# Altium PCB EFR32MG24_Minimum_BOM_REF_DES_A00_PCB.PcbDoc
Units mm, origin at the board's own origin, x right, y up, seen from the top; angles counter-clockwise.
Board outline 19.7 x 27.79 mm, 4 copper layers (Top Layer, Inner 2 GND Plane, Inner 3 Signal Layer, Bottom Layer), stack 1.6 mm thick; 48 components, 47 nets, 142 pads, 167 vias.
Unrouted connection lines stored in the file: 3.
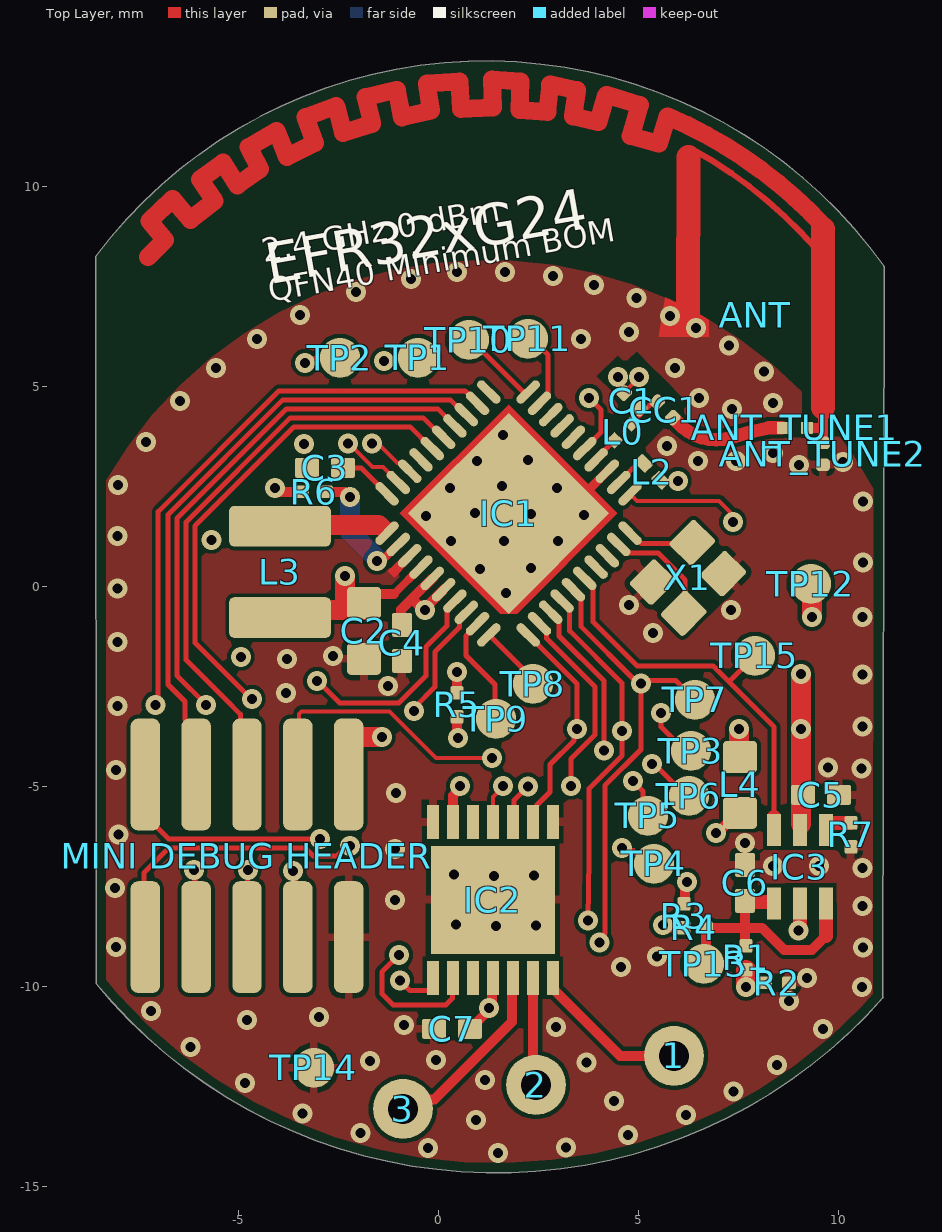
[diagram p0: Top Layer view]
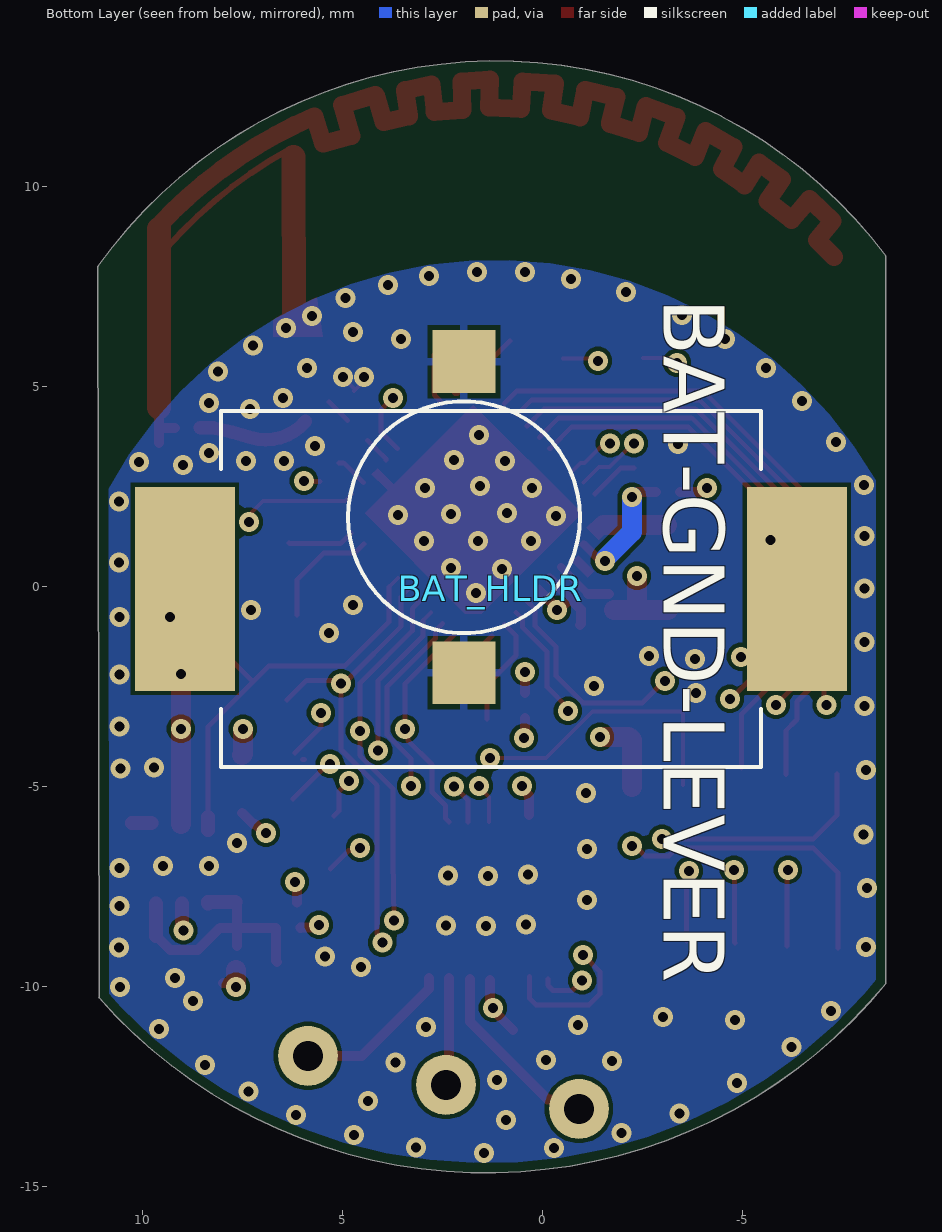
[diagram p1: Bottom Layer view, seen from below]
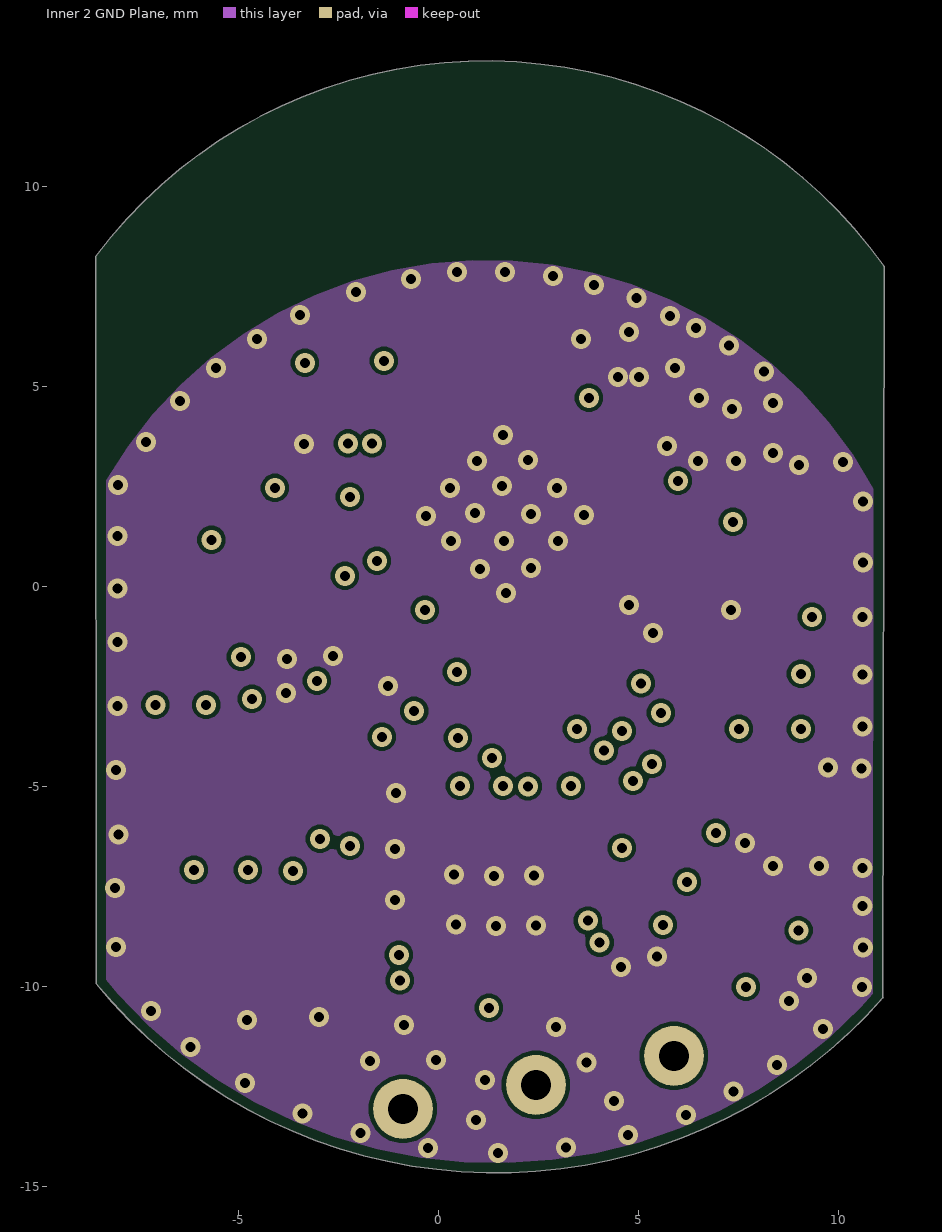
[diagram p2: Inner 2 GND Plane]
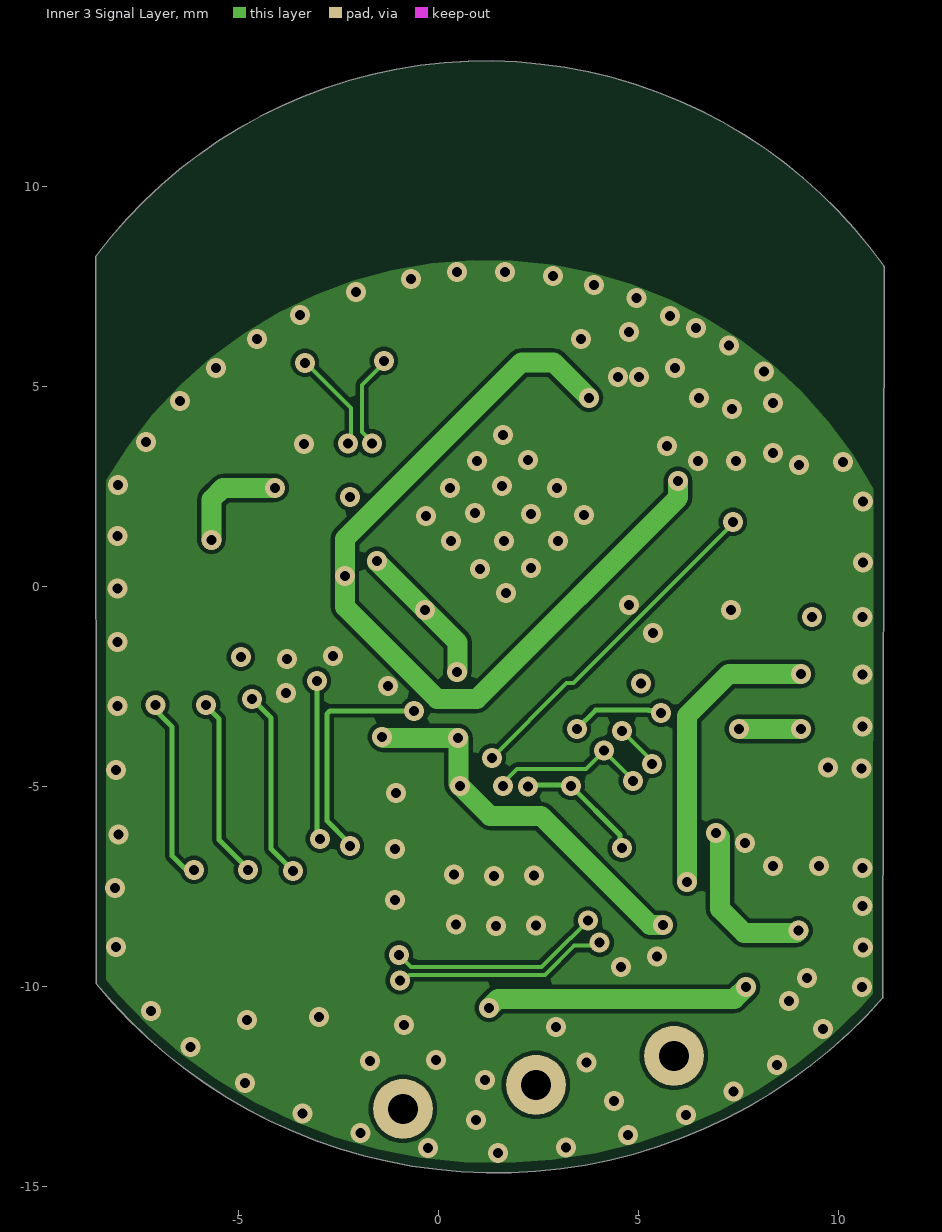
[diagram p3: Inner 3 Signal Layer]

## Layer stack, top to bottom
Top Solder: solder mask 0.0102, Solder Resist, Dk 3.5
Top Layer: signal copper 0.035
Dielectric 1: core 0.325, FR-4, Dk 4.2
Inner 2 GND Plane: signal copper 0.018
Dielectric 2: prepreg 0.844, FR-4, Dk 4.2
Inner 3 Signal Layer: signal copper 0.018
Dielectric 3: core 0.325, FR-4, Dk 4.2
Bottom Layer: signal copper 0.035
Bottom Solder: solder mask 0.0102, Solder Resist, Dk 3.5

## Board outline
-8.574,-9.914 ccw(c1.415,-1.751) 11.101,-10.271 11.1,-10.262 11.125,8.014 11.124,8.017 ccw(c1.181,0.947) -8.573,8.274 -8.575,8.261

## Design rules (kind name [scope] priority, off if disabled: settings)
AcuteAngle [All] p1: minimum=7.00000000000000E+0001 checktracksonly=FALSE
BoardOutlineClearance [All] p1: gap=0.25 ignorepadtopadclearanceinfootprint=FALSE
Clearance Clearance_50Ohm [InNetClass('50R_CC1')] p1: gap=0.27 ignorepadtopadclearanceinfootprint=FALSE
Clearance Clearance_to_Holes [InPadClass('NPTH')] p2: gap=0.254 ignorepadtopadclearanceinfootprint=FALSE except(0: Arc-Hole Track-Hole SMDPad-Hole THPad-Hole Via-Hole Fill-Hole Poly-Hole Region-Hole Text-Hole)
Clearance Clerance_Polygon [InPolygon] p3: gap=0.1 ignorepadtopadclearanceinfootprint=FALSE except(0: Arc-Hole Track-Hole SMDPad-Hole THPad-Hole Via-Hole Fill-Hole Poly-Hole Region-Hole Text-Hole)
Clearance Clearance_General [All] p4: gap=0.1 ignorepadtopadclearanceinfootprint=FALSE except(0: Arc-Hole Track-Hole SMDPad-Hole THPad-Hole Via-Hole Fill-Hole Poly-Hole Region-Hole Text-Hole)
HoleToHoleClearance HoleToHoleClearance_ANT1toPAD [Incomponent ('ANT1') vs ISpad] p1: gap=0 allowstackedmicrovias=TRUE
HoleToHoleClearance HoleToHoleClearance_R1toR2_1 [Incomponent ('R1') vs Incomponent ('R2')] p2: gap=0 allowstackedmicrovias=TRUE
HoleToHoleClearance HoleToHoleClearance_U1toVIA_1 [InComponent ('U1') vs IsVia] p3: gap=0 allowstackedmicrovias=TRUE
HoleToHoleClearance [All] p4: gap=0.254 allowstackedmicrovias=TRUE
MinimumSolderMaskSliver [All] p1: minsoldermaskwidth=0.075
PolygonConnect Polygon_VIA_Connect [IsVia] p1: connectstyle=Direct reliefconductorwidth=0.254 reliefentries=4 polygonreliefangle="90 Angle" airgapwidth=0.254
PolygonConnect PolygonConnect_SH100 [InComponent('ANT')] p2: connectstyle=Direct reliefconductorwidth=0.254 reliefentries=4 polygonreliefangle="90 Angle" airgapwidth=0.127
PolygonConnect PolygonConnect_P1 [InComponent('P1') or Incomponent('ANT')] p3: connectstyle=Relief reliefconductorwidth=0.3 reliefentries=4 polygonreliefangle="90 Angle" airgapwidth=0.127
PolygonConnect [All] p4: connectstyle=Relief reliefconductorwidth=0.2 reliefentries=4 polygonreliefangle="90 Angle" airgapwidth=0.125
RoutingVias [All] p1: holewidth=0.3 width=0.65 viastyle="Through Hole" minholewidth=0.25 minwidth=0.5 maxholewidth=1 maxwidth=1.5
ShortCircuit ShortCircuit_ANTtoPAD [InNet('NetAT1_1') vs InNet('GND')] p1: allowed=TRUE
ShortCircuit ShortCircuit_R1toR2_1 [Incomponent ('R1') vs Incomponent ('R2')] p2: allowed=TRUE
ShortCircuit [All] p3: allowed=FALSE
SilkToSilkClearance [All] p1: silktosilkclearance=0.102
SilkToSolderMaskClearance [IsPad] p1: minsilkscreentomaskgap=0.102 clearancetoexposedcopper=TRUE
SolderMaskExpansion [All] p1: expansion=0.051 istentingtop=FALSE
Width Supply [InNetClass('Supply')] p1: maxlimit=0.254 minlimit=0.2 preferedwidth=0.254 toplayer_maxwidth=0.2 toplayer_prefwidth=0.2 midlayer1_minwidth=0.254 midlayer2_minwidth=0.254 bottomlayer_maxwidth=0.2 bottomlayer_prefwidth=0.2 minimp=50.000000 maximp=50.000000 favimp=50.000000
Width 50ohm [InNet('50R*')] p2: maxlimit=0.6 minlimit=0.124 preferedwidth=0.457 midlayer1_maxwidth=0.457 midlayer2_maxwidth=0.457 minimp=50.000000 maximp=50.000000 favimp=50.000000
Width [All] p3: maxlimit=5.08 minlimit=0.1 preferedwidth=0.125
25 further rules are at their usual default settings.

## Components (designator, comment, footprint, x,y, rotation, side; value= is the part's Value field where it differs from the comment)
1 "Sensor Electrode" "Sensor Electrode" 5.875,-11.725 r90 top
2 "Sensor Electrode" "Sensor Electrode" 2.425,-12.45 r90 top
3 "Sensor Electrode" "Sensor Electrode" -0.9,-13.05 r90 top
ANT "INVERTED_F" "ANT_MEANDERED_2445 - FABRICATION - cut" 7.12,7.781 r90 top locked
ANT_TUNE1 "0R" COIL_0201_L 8.9,3.975 r0 top
ANT_TUNE2 "NM" C0201_L 9.6,3.325 r270 top
BAT-GND-LEVER "2991" 2991 1.975,1.74 r180 bottom locked
BAT_HLDR "BAT-HLD-012-SMT" BATHLD012SMT 1.3,-0.05 r180 bottom locked
C1 "1P4" C0201_L 4.825,4.65 r135 top
C2 "4U7" C0603_L -1.875,-1.1 r270 top
C3 "1U" C0402_L -2.85,2.975 r180 top
C4 "1U" C0402_L -0.925,-1.4 r270 top
C5 "10U" C0402_L 9.55,-5.2 r180 top
C6 "10U" C0402_L 7.65,-7.4 r270 top
C7 "NM" C0402_L 0.325,-11.05 r0 top
CC1 "18P" C0201_L 5.65,4.425 r315 top
Designator39 "Comment" PCB_SPEC_4_LAYER -128.425,108.325 r0 top
IC1 "EFR32MG24A010F1536IM40-B" QFN40_M040_5.0X5.0_EP_RP_SL 1.738,1.834 r135 top
IC2 "LMP91000SDE" SON50P400X400X80-15N 1.35,-7.825 r270 top
IC3 "MAX17223ELT+" MAX17223ELT 9.025,-7 r90 top
L0 "1N8" COIL_0201_L 4.6,3.875 r45 top
L2 "BLM03AG700SN1D" COIL_MUR_BLM03_0201 5.325,2.875 r135 top
L3 "2U2" COIL_1008_L -3.975,0.375 r270 top
L4 "1U" C0603_L 7.525,-4.95 r270 top
"MINI DEBUG HEADER" "FTSH-105-01-F-DV-K" FTSH_105_01_L_DV_K -4.8,-6.725 r180 top
R1 "NM" R0201_L 7.675,-9.275 r90 top
R2 "NM" R0201_L 8.45,-9.9 r180 top
R3 "0R" R0201_L 6.125,-8.225 r270 top
R4 "NM" R0201_L 6.375,-8.525 r180 top
R5 "0R" R0201_L 0.45,-2.95 r90 top
R6 "NM" R0201_L -3.125,2.375 r0 top
R7 "RSEL" R0201_L 10.3,-6.2 r270 top
TP1 "TP" TP_1.0_SMD -0.525,5.725 r0 top
TP2 "TP" TP_1.0_SMD -2.475,5.725 r90 top
TP3 "TP" TP_1.0_SMD 6.3,-4.1 r90 top
TP4 "TP" TP_1.0_SMD 5.375,-6.925 r90 top
TP5 "TP" TP_1.0_SMD 5.225,-5.725 r90 top
TP6 "TP" TP_1.0_SMD 6.25,-5.225 r90 top
TP7 "TP" TP_1.0_SMD 6.4,-2.825 r90 top
TP8 "TP" TP_1.0_SMD 2.35,-2.425 r90 top
TP9 "TP" TP_1.0_SMD 1.425,-3.3 r90 top
TP10 "TP" TP_1.0_SMD 0.75,6.175 r90 top
TP11 "TP" TP_1.0_SMD 2.225,6.2 r90 top
TP12 "TP" TP_1.0_SMD 9.3,0.075 r270 top
TP13 "TP" TP_1.0_SMD 6.625,-9.425 r90 top
TP14 "TP" TP_1.0_SMD -3.125,-12.025 r90 top
TP15 "TP" TP_1.0_SMD 7.9,-1.725 r90 top
X1 "39.000 MHz" X_SSS_DSX211SH_2.05X1.65-4 6.225,0.225 r225 top

## Footprints (in the part's own frame and the unit in brackets; to place one, negate y for a bottom-side part, rotate by r counter-clockwise, add the part's x,y. Pads: shape width x height; smd on the part's side, far side on the other; paste and mask are expansions set on the pad)
2991 [mm]
  rect 1.57x1.57 smd: 1(0,3.89) 2(0,-3.89)
  silkscreen extent -2.9,-2.9 2.9,2.9
"ANT_MEANDERED_2445 - FABRICATION - cut" [mm]
  round 0.2 on Mech16 paste-0.254 mask-0.254: 1(-1.715,-2.474) 2(-0.273,0.913)
  Top Layer lines w0.15: 3.16,0.782 cw(c-6.901,6.352) 0.664,-2.31
  Top Layer lines w0.45: 0.466,14.394 0.889,13.97 ; 0.908,13.983 1.362,14.362 1.917,13.782 1.395,13.337 1.87,12.728 2.402,13.095 2.824,12.52 2.258,12.16 2.665,11.592 3.21,11.877 3.615,11.177 2.97,10.92 3.314,10.223 3.96,10.459 4.246,9.693 3.565,9.515 3.796,8.793 4.459,8.957 4.642,8.174 3.956,8.046 4.123,7.321 4.806,7.424 4.847,6.603 4.168,6.571 4.196,5.775 4.899,5.798 4.854,5.083 4.145,5.111 4.094,4.412 4.777,4.339 4.635,3.668 3.982,3.773 3.836,3.136 4.519,2.935 4.264,2.1 3.489,2.328 3.298,1.62 3.983,1.404 cw(c-6.589,5.929) 1.2,-2.531
  Top Layer lines w0.6: -1.016,0.889 2.961,0.886 ; -2.366,-2.483 1.164,-2.483
BATHLD012SMT [mm]
  rect 2.5x5.1 smd: 1(-7.65,0) 2(7.65,0)
  silkscreen extent -6.75,-4.45 6.75,4.45, body extent -7.78,-4.83 7.52,4.67, height 3.61
C0201_L [mm] "Capacitor, Chip; 0.60 mm L X 0.30 mm W X 0.33 mm H body"
  rrect52% 0.31x0.34 smd: 1(-0.275,0) 2(0.275,0)
  body extent -0.3,-0.15 0.3,0.15, height 0.3
C0402_L [mm] "Chip Capacitor, 2-Leads, Body 1.0x0.5mm, IPC High Density"
  rrect20% 0.6x0.5 smd mask+0.051: 1(-0.45,0) 2(0.45,0)
  body extent -0.5,-0.25 0.5,0.25, height 0.6
C0603_L [mm] "Capacitor, 0603, HiDens (190130)"
  rrect25% 0.8x0.85 smd: 1(-0.7,0) 2(0.7,0)
  body extent -0.88,-0.48 0.87,0.48, height 0.95
COIL_0201_L [mm] "JELF243C-0021"
  rrect10% 0.3x0.3 smd: 1(-0.3,0) 2(0.3,0)
  body extent -0.32,-0.17 0.32,0.17, height 0.33
COIL_1008_L [mil] "Chip Inductors, 1008 (2520), Coilcraft (190207)"
  rrect25% 40x100 smd: 1(-45,0) 2(45,0)
  body extent -58,-55 57,55, height 80
COIL_MUR_BLM03_0201 [mm] "COIL_MUR_BLM03_0201"
  rrect25% 0.4x0.3 smd mask+0.051: 1(-0.3,0) 2(0.3,0)
  body extent -0.3,-0.15 0.3,0.15, height 0.95
FTSH_105_01_L_DV_K [mil] "FTSH-105-01-L-DV-K-P-TR"
  rrect50% 29x110 smd: 1(-100,-80) 2(-100,80) 3(-50,-80) 4(-50,80) 5(0,-80) 6(0,80) 7(50,-80) 8(50,80) 9(100,-80) 10(100,80)
  body extent -125,-115 125,115, height 231
MAX17223ELT [mm]
  rect 0.8x0.35 smd: 1(-0.915,0.65) 2(-0.915,0) 3(-0.915,-0.65) 4(0.915,-0.65) 5(0.915,0) 6(0.915,0.65)
  body extent -1,-1 1,1, height 0.9
PCB_SPEC_4_LAYER [mm]
QFN40_M040_5.0X5.0_EP_RP_SL [mm]
  rect 3.55x3.55 smd paste-1.95 mask+0.05: 0(0,0)
  oval 0.74x0.22 smd mask+0.05: 1(-2.495,1.8) 2(-2.495,1.4) 3(-2.495,1) 4(-2.495,0.6) 5(-2.495,0.2) 6(-2.495,-0.2) 7(-2.495,-0.6) 8(-2.495,-1) 9(-2.495,-1.4) 10(-2.495,-1.8) 21(2.495,-1.8) 22(2.495,-1.4) 23(2.495,-1) 24(2.495,-0.6) 25(2.495,-0.2) 26(2.495,0.2) 27(2.495,0.6) 28(2.495,1) 29(2.495,1.4) 30(2.495,1.8)
  oval 0.22x0.74 smd mask+0.05: 11(-1.8,-2.495) 12(-1.4,-2.495) 13(-1,-2.495) 14(-0.6,-2.495) 15(-0.2,-2.495) 16(0.2,-2.495) 17(0.6,-2.495) 18(1,-2.495) 19(1.4,-2.495) 20(1.8,-2.495) 31(1.8,2.495) 32(1.4,2.495) 33(1,2.495) 34(0.6,2.495) 35(0.2,2.495) 36(-0.2,2.495) 37(-0.6,2.495) 38(-1,2.495) 39(-1.4,2.495) 40(-1.8,2.495)
  Top Layer region: 1.925,-1.925 -1.925,-1.925 -1.925,1.625 -1.625,1.925 1.925,1.925
  Top Layer pour cut-out: -2.125,1.925 -2.125,-1.925 -1.925,-2.125 1.925,-2.125 2.125,-1.925 2.125,1.925 1.925,2.125 -1.925,2.125
  body extent -2.5,-2.5 2.5,2.5, height 1.01
R0201_L [mm] "Resistor (Chip2PinSM127P600-8N) (170921)"
  rrect25% 0.34x0.32 smd: 1(-0.3,0) 2(0.3,0)
  body extent -0.32,-0.13 0.32,0.13, height 0.3
"Sensor Electrode" [mm]
  round 1.5 hole 0.75: 1(0,0)
SON50P400X400X80-15N [mm]
  rect 0.85x0.3 smd: 1(-1.95,1.5) 2(-1.95,1) 3(-1.95,0.5) 4(-1.95,0) 5(-1.95,-0.5) 6(-1.95,-1) 7(-1.95,-1.5) 8(1.95,-1.5) 9(1.95,-1) 10(1.95,-0.5) 11(1.95,0) 12(1.95,0.5) 13(1.95,1) 14(1.95,1.5)
  rect 2.7x3.1 smd: 15(0,0)
  body extent -2,-2 2,2, height 0.8
TP_1.0_SMD [mm] "Test Point, 1.0 mm, SMD"
  round 1 smd paste-0.501: 1(0,0)
  body extent -0.2,-0.2 0.2,0.2, height 0.01
X_SSS_DSX211SH_2.05X1.65-4 [mm] "X_SSS_DSX211SH_2.05X1.65-4"
  rrect20% 0.9x0.8 smd mask+0.051: 1(-0.7,-0.55) 2(0.7,-0.55) 3(0.7,0.55) 4(-0.7,0.55)
  body extent -1.07,-0.87 1.07,0.87, height 0.5

## Part data
ANT_TUNE1 L0: library part L0201, Tolerance=±0.1N, Mfg=Murata, Mfg #=LQP03HQ2N5B02D, PCB Footprint=COIL_0201_L
ANT_TUNE2 C1 C5 C6: library part C0201, Tolerance=±0.05P, Mfg=Murata, Mfg #=GRM0335C1H1R6WA01D, PCB Footprint=C0201_L, Technology=C0G
BAT-GND-LEVER: "Undefined or Miscellaneous", Manufacturer_Name="Keystone Electronics", Mouser Part Number=534-2991, Arrow Part Number=2991, Arrow Price/Stock=https://www.arrow.com/en/products/2991/keystone-electronics, Datasheet Link=https://www.keyelco.com/product-pdf.cfm?p=3976, Height=0.41mm, Manufacturer_Part_Number=2991, Mouser Price/Stock=https://www.mouser.co.uk/ProductDetail/Keystone-Electronics/2991?qs=BmwE3IFx0MdjpbU%252BK1etPg%3D%3D
BAT_HLDR: "BATTERY RETAINER COIN 12MM SMD", Manufacturer=Linx, Category=Uncategorized, ComponentLink1Description=https://datasheet.ciiva.com/4/bat-hld-012-smt-4040.pdf?src-supplier=Digi-Key, ComponentLink1URL=https://datasheet.ciiva.com/4/bat-hld-012-smt-4040.pdf?src-supplier=Digi-Key, ComponentLink2Description=https://datasheet.ciiva.com/4642/bat-hld-012-smt20diagram-194862-4642562.pdf?src-supplier=Mouser, ComponentLink2URL=https://datasheet.ciiva.com/4642/bat-hld-012-smt20diagram-194862-4642562.pdf?src-supplier=Mouser, ComponentLink3Description=https://datasheet.ciiva.com/16418/bat-hld-012-smt-16418358.pdf?src-supplier=Future+Electronics, ComponentLink3URL=https://datasheet.ciiva.com/16418/bat-hld-012-smt-16418358.pdf?src-supplier=Future+Electronics, Manufacturer Part Number=BAT-HLD-012-SMT, Pricing 1="1=0,40000, 10=0,38300, 25=0,37520, 100=0,36800, 250=0,35000, 500=0,33500, 1000=0,30100, 5000=0,24960 (USD)", RoHS=Yes, Stock 1=35581, Supplier 1=Digi-Key
C2: library part C0603, Rating=6.3V, Tolerance=20%, PCB Footprint=C0603_L, Technology=X5R
C3 C4 C7: library part C0402, Rating=6.3V, Tolerance=10%, PCB Footprint=C0402_L, Technology=X7R
CC1: library part C0201, Tolerance=±2%, Mfg=Murata, Mfg #=GJM0335C1E180GB01D, PCB Footprint=C0201_L, Technology=C0G
IC1: library part EFR32xG24_QFN40, Mfg="Silicon Labs", Mfg #=EFR32MG24B210F1536IM48-BR, PCB Footprint=QFN48_M040_6.0X6.0_EP_SL
IC2: "Integrated Circuit", Manufacturer_Name="Texas Instruments", Datasheet Link=https://www.ti.com/lit/ds/symlink/lmp91000.pdf?ts=1600318850436&ref_url=https%253A%252F%252Fwww.ti.com%252Fstore%252Fti%252Fen%252Fp%252Fproduct%252F%253Fp%253DLMP91000SDE%252FNOPB, Height=0.8mm, Manufacturer_Part_Number=LMP91000SDE
IC3: "Integrated Circuit", Manufacturer_Name="Maxim Integrated", Mouser Part Number=700-MAX17223ELT+, Datasheet Link=https://componentsearchengine.com/Datasheets/1/MAX17223ELT+.pdf, Height=0.8mm, Manufacturer_Part_Number=MAX17223ELT+, Mouser Price/Stock=https://www.mouser.co.uk/ProductDetail/Maxim-Integrated/MAX17223ELT%2b?qs=xhbEVWpZdWfeoUoo5CwP2w%3D%3D
L2: library part BLM03AX, Mfg=Murata, Mfg #=BLM03AG700SN1D, PCB Footprint=COIL_MUR_BLM03_0201, Price_1K=0.05
L3 L4: library part L1008, Tolerance=+/-20%, Mfg=Murata, Mfg #=DFE2HCAH2R2MJ0L, PCB Footprint=COIL_1008_L
"MINI DEBUG HEADER": library part CN-2P-M-R10, "Male Header, Pitch 1.27 mm, 2 x 5 Position, Height 6.12 mm, RoHS, Tube", Color=Black, Manufacturer=Samtec, Package Description="Male Header, Pitch 1.27 mm, 2 x 5 Position, Height 5.97 mm, Tail Length 4.32 mm", Package Reference=FTSH-105-01-L-DV-K, Category=Connectors,Interconnects, Connector Type=Header,Shrouded, Contact Finish=Gold, Contact Finish Thickness=3µin(0.08µm), Contact Mating Length="0.120\"(3.05mm)", Contact Type=MalePin, Datasheet URL=http://suddendocs.samtec.com/prints/ftsh-1xx-xx-xxx-dv-xxx-mkt.pdf, Datasheet Version="Rev. ET, 10/1995", Family=RectangularConnectors-Headers,MalePins, Fastening Type=-, Features=-, Manufacturer URL=http://www.samtec.com/, Mounting Type=SurfaceMount, Number of Positions=10, Number of Positions Loaded=All, Number of Rows=2, Package URL=http://suddendocs.samtec.com/prints/ftsh-1xx-xx-xxx-dv-xxx-footprint.pdf, Packaging=Tube, Pitch="0.050\"(1.27mm)", Row Spacing="0.050\"(1.27mm)", Series=FTSH, Termination=Solder
R1 R2: library part Resistor, "100K,±0.1%,0402", 厂商=Yageo, 名称=电阻, 型号=100K,±0.1%, 封装=0402R, 物料代码=8.02.17.1406, 设备封装名称=R0402_100K, 贴片和直插=SMT
R3 R4 R5 R6 R7: library part R0201_0R
TP1 TP2 TP3 TP4 TP5 TP6 TP7 TP8 TP9 TP10 TP11 TP12 TP13 TP14 TP15: library part TPJ_SMD_Dup1, PCB Footprint=TP_1.0_SMD
X1: library part DSX211SH, Mfg=TXC, Mfg #=8Y39072002, PCB Footprint=KDS_DSX211SH_2016, Price_1K=0.512
1 2 3: 封装=1.2*1.2*0.6, 贴片和直插=孔洞
ANT: PCB Footprint=EM358x_INVERTED_F

## Via types
v1: diameter 0.5, hole 0.25, Top Layer to Bottom Layer, tented both sides, 167 vias

## Nets (pads, with @x,y where several pads share a name; then routed paths per layer and width w, separated by ;. In a path a pad name is that pad's centre, name@x,y a point inside that pad or via, vN(x,y) a via of type N, cw(c..) or ccw(c..) an arc to the next point about the centre after c; other vN are vias at no path point)
50R_ANT: ANT_TUNE1.2 ANT_TUNE2.1 | length 2.2
  Top Layer w0.25: ANT_TUNE1.2 9.575,3.975 ; ANT_TUNE2.1 9.6,4.482
  Top Layer w0.6: 9.601,4.482 9.601,5.434
50R_CC1: ANT_TUNE1.1 CC1.2 | length 2.8
  Top Layer w0.335: CC1.2@5.937,4.138 ccw(c6.928,4.969) 7.309,3.733 ; 7.312,3.734 cw(c9.8,-3.948) 8.243,3.975 ANT_TUNE1.1@8.575,3.975
ADC_in: IC1.4 TP6.1 | length 20.4
  Top Layer w0.125: v1(-1,-9.2) -1.425,-9.625 -1.425,-10.175 -1.15,-10.45 0.175,-10.45 0.337,-10.288 0.337,-9.737 ; IC1.4@3.075,-0.35 3.266,-0.541 3.266,-1.101 4.575,-2.41 v1(4.575,-3.6) 4.575,-4.222 3.75,-5.047 3.75,-6.813 3.728,-8.301 3.728,-8.339 v1(3.721,-8.346) ; v1(5.325,-4.425) 5.375,-4.425 TP6.1@6.25,-5.3
  Inner 3 Signal Layer w0.1: v1(-1,-9.2) -0.7,-9.5 2.567,-9.5 3.292,-8.775 3.3,-8.775 3.721,-8.354 v1(3.721,-8.346) ; v1(4.575,-3.6) 5.325,-4.35 v1(5.325,-4.425)
CE: 1.1 IC2.14 | length 4
  Top Layer w0.25: IC2.14 2.85,-10.05 2.875,-10.075 4.525,-11.725 1.1
EFR32_PA00: IC1.21
EFR32_PA01: "MINI DEBUG HEADER.8" IC1.22 | length 20.6
  Top Layer w0.125: v1(-7.091,-2.95) -7.019,-2.878 -7.019,1.879 -3.998,4.9 0.651,4.9 IC1.22 ; v1(-6.125,-7.075) -6.097,-7.102 -6.097,-8.972 -6.1,-8.975
  Inner 3 Signal Layer w0.125: v1(-7.091,-2.95) -7.091,-3.051 -6.973,-3.169 -6.973,-3.202 -6.675,-3.5 -6.675,-6.725 v1@-6.275,-7.125
EFR32_PA02: "MINI DEBUG HEADER.7" IC1.23 | length 15.6
  Top Layer w0.125: -6.07,-4.693 -6.07,-3.598 -6.35,-3.318 -6.35,-2.868 -6.775,-2.443 -6.775,1.805 -3.905,4.675 0.285,4.675 IC1.23@0.655,4.305
EFR32_PA03: "MINI DEBUG HEADER.6" IC1.24 | length 19.6
  Top Layer w0.125: v1(-5.821,-2.95) -6.55,-2.221 -6.55,1.711 -3.811,4.45 -0.03,4.45 IC1.24 ; -4.8,-8.9 -4.787,-8.887 -4.787,-7.087 v1(-4.775,-7.075)
  Inner 3 Signal Layer w0.125: v1(-5.821,-2.95) -5.821,-2.979 -5.5,-3.3 -5.5,-6.325 v1@-4.8,-7.025
EFR32_PA04: "MINI DEBUG HEADER.5" IC1.25 | length 14.4
  Top Layer w0.125: -4.965,-4.528 -4.965,-3.185 -5.35,-2.8 -6.325,-1.825 -6.325,1.618 -3.718,4.225 -0.396,4.225 IC1.25@0.089,3.739
EFR32_PA05: "MINI DEBUG HEADER.4" IC1.26 | length 18.6
  Top Layer w0.125: v1@-4.7,-2.8 -6.1,-1.4 -6.1,1.525 -3.625,4 -0.722,4 -0.179,3.456 IC1.26 ; v1(-3.65,-7.1) v1@-3.59,-7.16 ; v1@-3.625,-7.125 v1@-3.59,-7.16 ; -3.59,-8.86 v1@-3.59,-7.16
  Inner 3 Signal Layer w0.125: v1(-4.675,-2.8) -4.2,-3.275 -4.2,-6.55 v1@-3.675,-7.075
EFR32_PA06: IC1.27
EFR32_PA07: IC1.28 TP1.1 | length 4.5
  Top Layer w0.1: v1(-1.675,3.587) -1.598,3.511 -1.451,3.511 -1.038,3.097 -0.94,3.097 IC1.28 ; v1(-1.375,5.65) -1.321,5.704 TP1.1@-0.5,5.704
  Inner 3 Signal Layer w0.1: v1(-1.675,3.587) -1.675,3.625 -1.925,3.875 -1.925,5.051 v1@-1.35,5.626
EFR32_PA08: IC1.29 TP2.1 | length 5.1
  Top Layer w0.1: v1(-3.35,5.6) -3.291,5.6 -3.166,5.725 TP2.1@-2.5,5.725 ; v1(-2.275,3.584) -2.251,3.584 -1.658,2.991 -1.399,2.991 IC1.29
  Inner 3 Signal Layer w0.1: v1@-3.325,5.6 -2.2,4.475 -2.2,3.659 v1(-2.275,3.584)
EFR32_PB00: IC1.20 TP10.1 | length 2
  Top Layer w0.125: TP10.1@0.825,6.15 2.136,4.839 2.198,4.839 IC1.20
EFR32_PB01: IC1.19 TP11.1 | length 1.9
  Top Layer w0.125: TP11.1@2.3,6.225 2.725,5.8 2.725,4.868 2.714,4.857 2.714,4.79 IC1.19
EFR32_PB02: IC1.18
EFR32_PB03: IC1.17
EFR32_PB04: IC1.16
EFR32_PC00: IC1.1 IC2.2 TP3.1 | length 9.3
  Top Layer w0.125: IC1.1 3.45,-2.424 v1(3.45,-3.55) 3.378,-3.622 3.378,-3.84 2.775,-4.444 2.775,-5.129 2.437,-5.467 2.437,-5.788 IC2.2 ; v1(5.55,-3.15) 5.55,-3.5 TP3.1@6.2,-4.15 ; TP3.1@5.961,-4.311 TP3.1@6.011,-4.311
  Inner 3 Signal Layer w0.125: v1(3.45,-3.55) 3.917,-3.083 5.231,-3.083 5.24,-3.091 5.377,-3.091 5.475,-3.19 v1@5.475,-3.225
EFR32_PC01: IC1.2 IC2.3 TP4.1 | length 10
  Top Layer w0.125: IC2.3@1.875,-5.875 1.875,-5.333 v1(2.219,-4.989) ; IC1.2 2.686,-1.094 2.686,-1.287 3.9,-2.501 3.9,-3.7 3.297,-4.303 v1(3.297,-4.975) ; v1(4.571,-6.525) 4.643,-6.597 4.86,-6.597 TP4.1@5.314,-7.05
  Inner 3 Signal Layer w0.125: v1@2.225,-5 2.275,-4.95 3.272,-4.95 4.525,-6.203 4.525,-6.478 v1(4.571,-6.525)
EFR32_PC02: IC1.3 IC2.4 TP5.1 | length 9.9
  Top Layer w0.1: IC2.4 1.35,-5.258 v1@1.619,-4.989 ; IC1.3 IC1.3@3.002,-0.845
  Top Layer w0.125: IC1.3@3.002,-0.845 3.002,-1.228 4.125,-2.351 4.125,-4.089 v1(4.119,-4.094) ; v1(4.849,-4.849) 4.849,-4.858 5.101,-5.11 5.101,-5.601 TP5.1
  Inner 3 Signal Layer w0.1: v1@1.65,-4.85 1.95,-4.55 3.675,-4.55 4.119,-4.106 v1(4.119,-4.094) ; v1@4.125,-4.1 4.849,-4.824 v1(4.849,-4.849)
  other v1: 1.6,-4.975
EFR32_PC04: IC1.5 IC2.8 TP7.1 | length 18
  Top Layer w0.1: IC1.5 IC1.5@3.545,-0.256 ; 4.147,-5.37 4.147,-5.328
  Top Layer w0.125: v1(-0.981,-9.839) -0.729,-10.091 -0.25,-10.091 -0.125,-9.966 IC2.8@-0.125,-9.8 ; IC1.5@3.545,-0.256 3.545,-0.988 4.887,-2.331 v1@4.969,-2.331 ; v1(4.018,-8.896) 4.018,-8.795 4.147,-8.666 4.147,-5.37 ; 4.147,-5.328 4.147,-4.968 5.05,-4.065 v1(5.05,-2.413) 5.122,-2.341 5.916,-2.341 TP7.1
  Inner 3 Signal Layer w0.1: v1(-0.981,-9.839) -0.873,-9.839 -0.734,-9.7 2.65,-9.7 3.377,-8.973 3.942,-8.973 v1(4.018,-8.896)
EFR32_PC05: IC1.6 IC3.6 TP15.1 | length 10.3
  Top Layer w0.1: IC1.6@3.625,0.225 IC1.6@3.85,0
  Top Layer w0.125: IC1.6@3.85,0 3.85,-0.875 4.95,-1.975 6.85,-1.975 7.1,-2.225 7.25,-2.375 ; TP15.1 7.25,-2.375 ; IC3.6@8.375,-5.725 8.375,-3.5 7.375,-2.5 7.25,-2.375
  Top Layer w0.35: IC3.6 IC3.6@8.375,-5.75
EFR32_PC06: IC1.7
EFR32_PC07: IC1.8
EFR32_PD00: IC1.40 TP8.1 | length 1.6
  Top Layer w0.125: IC1.40@1.275,-1.225 TP8.1@2.378,-2.328
EFR32_PD01: IC1.39 TP9.1 | length 2.8
  Top Layer w0.125: IC1.39@0.964,-0.936 0.675,-1.225 0.675,-1.717 1.4,-2.442 TP9.1@1.4,-3.3
EFR32_PD02: "MINI DEBUG HEADER.10" IC1.38 | length 16.2
  Top Layer w0.125: -7.375,-9.025 -7.375,-7.15 -6.75,-6.525 -3.35,-6.525 -3.15,-6.725 -2.55,-6.725 v1@-2.29,-6.465 ; v1(-0.621,-3.104) -0.621,-3.021 -0.1,-2.5 -0.1,-1.625 0.507,-1.018 0.507,-0.811 IC1.38
  Inner 3 Signal Layer w0.125: v1@-2.246,-6.433 -2.235,-6.455 -2.235,-6.431 -2.243,-6.407 -2.28,-6.37 -2.8,-5.85 -2.8,-3.173 -2.727,-3.1 -0.625,-3.1 v1(-0.621,-3.104)
  other v1: -2.225,-6.475
EFR32_PD03: "MINI DEBUG HEADER.9" IC1.37 | length 15.1
  Top Layer w0.125: -7.35,-4.675 -7.35,-5.712 -6.762,-6.3 -2.954,-6.3 v1@-2.951,-6.304 ; v1(-3.05,-2.35) -3.039,-2.35 -2.489,-2.9 -1,-2.9 -0.325,-2.225 -0.325,-1.5 0.196,-0.979 0.196,-0.557 IC1.37
  Inner 3 Signal Layer w0.125: v1(-3.05,-2.35) -3.05,-6.099 -2.9,-6.249 v1@-2.9,-6.35
  other v1: -2.975,-6.3
GND: "MINI DEBUG HEADER.2" ANT_TUNE2.2 BAT-GND-LEVER.1 BAT-GND-LEVER.2 C1.2 C2.2 C3.2 C4.2 C5.1 C6.1 C7.1 IC1.13 IC1.33 IC2.1 IC2.7 IC2.15 R2.1 R7.2 TP14.1 X1.2 X1.4 | length 0.8
  Top Layer w0.1: v1@4.425,5.2 C1.2@4.706,4.919 ; C1.2@4.725,4.9 C1.2@4.706,4.919 ; v1@4.975,5.2 4.968,5.2 4.706,4.937 C1.2@4.706,4.919
  other v1: 1.475,-14.15 -0.275,-14.025 3.176,-14.017 4.725,-13.7 -1.961,-13.656 0.925,-13.325 6.175,-13.2 -3.412,-13.164 4.375,-12.85 7.359,-12.614 -4.855,-12.409 1.15,-12.325 8.45,-11.95 3.686,-11.893 -1.725,-11.85 -0.075,-11.825 -6.212,-11.507 9.6,-11.05 2.925,-11 -0.876,-10.955 -4.8,-10.825 -3,-10.75 -7.2,-10.6 8.75,-10.35 10.575,-10 9.2,-9.775 4.55,-9.5 5.453,-9.237 10.594,-9.02 -8.075,-9 1.425,-8.475 2.425,-8.466 0.425,-8.441 10.592,-7.974 -1.1,-7.825 -8.1,-7.525 1.375,-7.225 2.375,-7.216 0.375,-7.191 10.59,-7.029 8.35,-6.975 9.5,-6.975 -1.1,-6.55 7.65,-6.4 -8.018,-6.186 -1.075,-5.15 -8.075,-4.576 10.565,-4.539 9.723,-4.515 10.586,-3.488 -8.036,-2.978 -3.825,-2.65 -1.275,-2.475 10.591,-2.187 -3.8,-1.8 -2.65,-1.725 -8.043,-1.375 5.35,-1.15 10.59,-0.748 7.3,-0.575 4.75,-0.45 1.675,-0.15 -8.039,-0.045 1.025,0.45 2.3,0.475 10.604,0.606 0.3,1.15 1.625,1.15 2.975,1.15 -8.043,1.272 -0.325,1.775 3.625,1.8 2.3,1.825 0.9,1.85 10.598,2.133 0.275,2.475 2.95,2.475 1.575,2.525 -8.025,2.55 9,3.05 10.1,3.125 0.95,3.15 6.475,3.15 7.425,3.15 2.225,3.175 8.35,3.35 5.7,3.525 -3.375,3.575 -7.325,3.625 1.6,3.8 7.325,4.45 8.351,4.59 -6.475,4.65 6.5,4.725 4.475,5.25 5,5.25 8.121,5.382 -5.575,5.475 5.9,5.475 7.251,6.034 -4.55,6.2 3.55,6.2 4.75,6.375 6.425,6.475 5.775,6.775 -3.475,6.8 4.942,7.22 -2.075,7.375 3.875,7.55 -0.7,7.7 2.85,7.775 0.45,7.875 1.65,7.875
NetC1_1: C1.1 CC1.1 L0.2 | length 0.7
  Top Layer w0.125: L0.2@4.887,4.162 5.125,4.4 CC1.1@5.35,4.625
NetC3_1: C3.1 IC1.30 | length 1.2
  Top Layer w0.125: C3.1@-2.275,2.975 -1.95,2.975 IC1.30
NetIC1_9: IC1.9 X1.3 | length 2.9
  Top Layer w0.125: IC1.9@4.475,1.075 4.693,0.857 4.761,0.857 4.769,0.85 5.476,0.85 6.152,0.174 X1.3@6.152,-0.7
NetIC1_10: IC1.10 X1.1 | length 1.7
  Top Layer w0.125: IC1.10@4.801,1.342 5.063,1.08 6.33,1.08 X1.1@6.35,1.1
NetIC1_14: IC1.14 L0.1 | length 0.7
  Top Layer w0.125: IC1.14 3.926,3.199 4.158,3.431 4.158,3.433 L0.1
NetIC1_31: IC1.31 L3.1 | length 1.6
  Top Layer w0.5: L3.1@-3.1,1.55 -1.507,1.55
NetIC3_2: IC3.2 L4.2 | length 5.7
  Top Layer w0.25: v1(6.925,-6.15) 6.971,-6.15 7.196,-5.925 7.25,-5.925 L4.2
  Top Layer w0.35: v1(8.988,-8.59) 8.988,-8.549 9.025,-8.513 IC3.2
  Inner 3 Signal Layer w0.5: v1(6.925,-6.15) 7.025,-6.25 7.025,-8.05 7.625,-8.65 8.928,-8.65 v1(8.988,-8.59)
NetIC3_4: IC3.4 R7.1 | length 0.5
  Top Layer w0.35: IC3.4@9.788,-5.9 R7.1@10.275,-5.9
PAVDD: C2.1 IC1.15 IC1.34 L2.1 L3.2 | length 27.5
  Top Layer w0.125: IC1.15 4.05,3.863 4.05,4.425 v1(3.75,4.725) ; L2.1@5.572,2.628 5.953,2.628 v1(5.975,2.65)
  Top Layer w0.2: -1.119,-0.175 IC1.34
  Top Layer w0.25: C2.1@-1.65,-0.175 -1.119,-0.175
  Top Layer w0.5: L3.2@-3.125,-0.575 -2.408,-0.575 ; v1(-2.35,0.275) -2.35,-0.517 -2.408,-0.575 ; C2.1@-1.775,-0.575 -2.408,-0.575
  Inner 3 Signal Layer w0.5: v1(3.75,4.725) 2.868,5.607 2.057,5.607 -2.35,1.2 -2.35,-0.5 -0.05,-2.8 0.95,-2.8 5.98,2.23 5.98,2.645 v1(5.975,2.65)
RE: 2.1 IC2.13 | length 2.7
  Top Layer w0.25: IC2.13 2.35,-12.275 2.1@2.5,-12.425
RESET: "MINI DEBUG HEADER.3" IC1.11 | length 18.3
  Top Layer w0.1: -3.5,-4.95 -3.5,-3.175 -3.438,-3.113 -1.237,-3.113 -0.075,-4.275 v1@1.096,-4.275 ; IC1.11 4.95,2.15 7,2.15 7.273,1.877 7.273,1.702 v1(7.35,1.625)
  Inner 3 Signal Layer w0.1: v1(1.325,-4.275) 3.193,-2.407 3.359,-2.407 7.35,1.584 v1(7.35,1.625)
RFVDD: IC1.12 L2.2 | length 0.8
  Top Layer w0.125: IC1.12 4.984,3.1 L2.2@5.1,3.1
VBAT: BAT_HLDR.1 BAT_HLDR.2 C5.2 IC3.5 L4.1 R3.1 R6.1 TP12.1 | length 18.1
  Top Layer w0.25: v1(-4.102,2.472) -4.034,2.472 -3.937,2.375 R6.1 ; R3.1@6.144,-7.896 6.144,-7.498 6.2,-7.443 v1(6.2,-7.375)
  Top Layer w0.5: v1(7.5,-3.55) 7.5,-4.175 L4.1@7.525,-4.2 ; IC3.5@9.05,-5.935 9.05,-5.25 9.05,-5.2 9.05,-4.983 v1(9.05,-2.175) ; v1(9.325,-0.75) TP12.1@9.325,-0.05
  Inner 3 Signal Layer w0.5: v1(-5.687,1.175) -5.687,2.182 -5.395,2.475 v1@-4.125,2.475 ; v1(6.2,-7.375) 6.2,-3.225 7.25,-2.175 v1(9.05,-2.175) ; v1(7.5,-3.55) 7.507,-3.557 9.043,-3.557 v1(9.05,-3.55)
  other v1: -4.95,-1.75
VBAT_reg: C6.2 IC3.1 IC3.3 R1.2 R4.1 TP13.1 | length 6.9
  Top Layer w0.25: TP13.1@6.65,-9.375 6.675,-9.35 R4.1 7.65,-8.525 ; R1.2@7.65,-8.975 7.65,-8.525 ; C6.2 7.65,-8.525 ; 9.675,-8.725 9.325,-9.075 8.625,-9.075 8.075,-8.525 7.65,-8.525
  Top Layer w0.35: C6.2@7.682,-7.882 8.375,-7.882 IC3.1 ; 9.675,-8.725 IC3.3
VMCU: "MINI DEBUG HEADER.1" C4.1 IC1.32 IC1.35 IC1.36 IC2.6 R3.2 R4.2 R5.1 R5.2 R6.2 | length 23.1
  Top Layer w0.2: v1(-1.55,0.65) -1.493,0.707 -1.373,0.707 -1.022,1.059 IC1.32
  Top Layer w0.25: R6.2 v1@-2.368,2.375 ; C4.1 -0.95,-0.925 -0.95,-0.572 -0.585,-0.207 IC1.35 ; -0.625,-0.35 -0.4,-0.575 v1(-0.35,-0.575) -0.35,-0.537 IC1.36 ; IC2.6@0.35,-5.7 0.352,-5.698 0.352,-5.216 0.525,-5.043 v1(0.525,-4.975) ; v1@0.45,-3.75 R5.1@0.45,-3.275 ; R5.2 v1(0.45,-2.125) ; v1(5.6,-8.45) 5.668,-8.45 5.736,-8.518 6.058,-8.518 R3.2@6.065,-8.525
  Top Layer w0.5: -2.225,-5 -2.225,-3.833 -2.142,-3.75 v1(-1.425,-3.75)
  Inner 3 Signal Layer w0.5: v1(-1.55,0.65) -1.55,0.625 v1(-0.35,-0.575) 0.464,-1.389 0.464,-2.111 v1(0.45,-2.125) ; v1(-1.425,-3.75) -1.4,-3.775 v1(0.475,-3.775) 0.485,-3.785 0.485,-4.935 1.275,-5.725 2.55,-5.725 5.275,-8.45 v1(5.6,-8.45)
  Bottom Layer w0.5: v1(-2.225,2.25) -2.225,1.375 v1@-1.575,0.725
VREF: C7.2 IC2.11 R1.1 R2.2 | length 8.8
  Top Layer w0.25: C7.2@0.75,-11.079 1.25,-10.579 v1(1.25,-10.525) 1.25,-10.457 1.325,-10.382 IC2.11@1.325,-9.825 ; v1@7.675,-9.904 R2.2@8.004,-9.904
  Top Layer w0.5: v1(7.675,-10) v1@7.675,-9.95 ; v1@7.675,-9.904 R1.1
  Inner 3 Signal Layer w0.5: v1(1.25,-10.525) 1.475,-10.3 7.382,-10.3 7.675,-10.007 v1(7.675,-10)
WE: 3.1 IC2.12 | length 4.7
  Top Layer w0.25: 3.1 -0.661,-12.811 -0.111,-12.811 1.825,-10.875 IC2.12@1.825,-9.8
pads on no net: ANT.1 ANT.2 IC1.0 IC2.5 IC2.9 IC2.10

## Polygon pours and split planes (outlines as drawn)
GND on Inner 3 Signal Layer "GND pour" (solid, pour order 2): -9.3,14.25 -9.35,14.2 -9.35,-15.025 11.825,-15.025 11.975,-14.875 11.975,14.1
GND on Inner 2 GND Plane "GND pour" (solid, pour order 1): -9.4,14.35 -9.4,-15.025 -9.3,-15.125 11.925,-15.125 11.925,14.1 11.975,14.15
GND on Bottom Layer "GND pour" (solid, pour order 3): -9.45,14.1 -9.45,-15.075 -9.4,-15.125 -9.25,-14.975 11.825,-14.975 11.825,14.1
GND on Top Layer "GND pour" (solid, pour order 0): -9.35,14.35 -9.3,14.3 -9.3,-15.125 11.925,-15.125 11.975,-15.175 11.975,14.25

## Other copper
Top Layer:
  region net NetIC1_31: -1.393,1.157 -1.077,1.473 -1.339,1.736 -1.656,1.419
  pour cut-out: -8.562,2.218 -8.575,8.25 -8.57,8.259 cw(c1.174,0.917) 11.125,7.975 11.113,2 11.099,2 ccw(c1.214,-2.825)
  region net GND: 5.796,7.173 6.541,6.796 6.749,6.675 6.749,6.25 5.5,6.25 5.652,7.235
  region net GND: 4.133,2.967 3.433,2.267 3.589,2.111 3.93,2.459 4.287,2.813
  pour cut-out: 9.211,3.741 9.211,3.225 9.78,3.225 9.797,3.474 9.78,3.741
  pour cut-out: 8.2,4.225 8.2,3.725 9.775,3.725 9.775,4.225
  region net GND: -0.725,0.625 -1.124,0.224 -1.124,0.227 -1.282,0.384 -0.88,0.786
  pour cut-out: 4.403,5.363 4.903,4.863 5.43,5.39 4.945,5.89
  pour cut-out: 3.934,5.266 4.625,4.575 5.143,5.093 4.47,5.788
  pour cut-out: 5.434,5.391 6.25,4.575 4.814,3.139 3.976,3.976
  pour cut-out: 5.938,0.162 6.8,-0.7 7.225,-0.275 6.4,0.55 6.325,0.55
  pour cut-out: 9.075,5.125 9.075,4.225 9.825,4.225 9.825,5.125
Inner 2 GND Plane:
  pour cut-out: -8.562,2.218 -8.575,8.25 -8.57,8.259 cw(c1.174,0.917) 11.125,7.975 11.113,2 11.099,2 ccw(c1.214,-2.825)
Inner 3 Signal Layer:
  pour cut-out: -8.562,2.218 -8.575,8.25 -8.57,8.259 cw(c1.174,0.917) 11.125,7.975 11.113,2 11.099,2 ccw(c1.214,-2.825)
Bottom Layer:
  pour cut-out: -8.562,2.218 -8.575,8.25 -8.57,8.259 cw(c1.174,0.917) 11.125,7.975 11.113,2 11.099,2 ccw(c1.214,-2.825)

## Silkscreen, mask and mechanical layers (free items; w line width, h text height)
Top Overlay:
  text "EFR32xG24" at -4.175,7.225 h1.75 r10
  text "2.4 GHz 0 dBm / QFN40 Minimum BOM" at -4.175,6.925 h1 r10
Top Solder:
  lines w0.175: -8.593,-9.903 -8.593,8.275 ; -8.59,-9.916 ccw(c1.409,-1.766) 11.07,-10.315 ; 11.075,-10.301 11.125,8.025
  lines w0.2: -8.579,8.288 cw(c1.174,0.957) 11.112,8.033
Bottom Solder:
  lines w0.175: -8.593,-9.903 -8.593,8.265 ; -8.591,-9.917 ccw(c1.437,-1.803) 11.071,-10.382 ; 11.082,-10.366 11.125,8.025
  lines w0.2: -8.579,8.288 cw(c1.174,0.957) 11.112,8.033
Board Outline:
  lines w0.1: -8.574,-9.914 ccw(c1.415,-1.751) 11.101,-10.271 ; -8.575,-9.9 -8.575,8.261 ; -8.573,8.274 cw(c1.181,0.947) 11.124,8.017 ; 11.1,-10.262 11.125,8.014
Mechanical 15:
  lines w0.025: 10.246,-48.75 10.454,-48.75 ; 10.35,-48.854 10.35,-48.646
Antenna clearance coutout:
  pour cut-out: -8.562,2.218 -8.575,8.25 -8.57,8.259 cw(c1.174,0.917) 11.125,7.975 11.113,2 11.099,2 ccw(c1.214,-2.825)
  lines w0.1: -8.575,2.225 -8.575,8.25 ; -8.57,8.259 cw(c1.174,0.917) 11.125,7.975 11.113,2 ; -8.562,2.218 cw(c1.214,-2.825) 11.099,2